# Altium PCB ComboCamera_MT9.PcbDoc (part 2 of 2)
Units mm, origin at the board's own origin, x right, y up, seen from the top; angles counter-clockwise.
Board outline 54.59 x 25.9 mm, 6 copper layers (L1, L2, Layer 1, Layer 2, L5, L6), stack 1.597 mm thick; 83 components, 53 nets, 269 pads, 162 vias.
Unrouted connection lines stored in the file: 226.
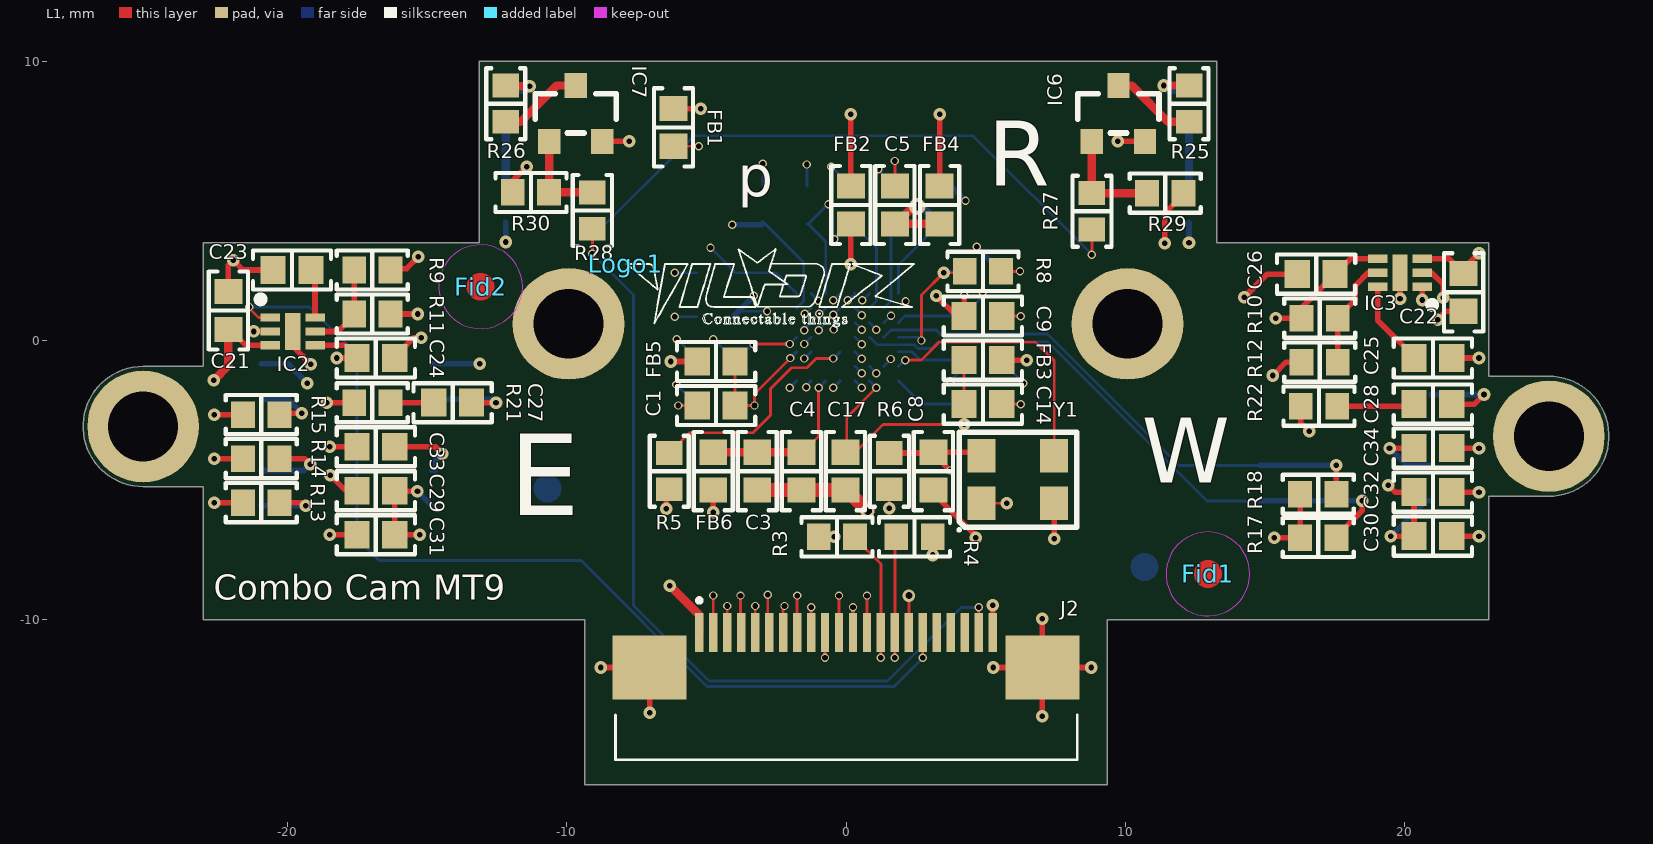
[diagram p0: L1 view]

## Via types
v1: diameter 0.3, hole 0.2, L1 to L6, tented both sides, 82 vias
v2: diameter 0.45, hole 0.2, L1 to L6, tented both sides, 77 vias
v3: diameter 0.45, hole 0.25, L1 to L6, tented both sides, 1 vias
v4: diameter 0.5, hole 0.3, L1 to L6, tented both sides, 1 vias
v5: diameter 0.6, hole 0.3, L1 to L6, tented both sides, 1 vias

## Nets (pads, with @x,y where several pads share a name; then routed paths per layer and width w, separated by ;. In a path a pad name is that pad's centre, name@x,y a point inside that pad or via, vN(x,y) a via of type N, cw(c..) or ccw(c..) an arc to the next point about the centre after c; other vN are vias at no path point) (continued)
D3: (continued)
  Layer 1 w0.1: -3.25,-9.2 v1(-3.25,-9.5) -3.25,-8.325 -2.986,-8.061 -2.986,-7.911 -2.986,-7.611 -2.982,-7.611 ccw(c-2.982,-7.461) -2.832,-7.461 ccw(c-2.982,-7.461) -2.982,-7.311 -2.986,-7.311 -3.1,-7.311 cw(c-3.1,-7.161) -3.25,-7.161 cw(c-3.1,-7.161) -3.1,-7.011 -2.986,-7.011 -2.982,-7.011 ccw(c-2.982,-6.861) -2.832,-6.861 ccw(c-2.982,-6.861) -2.982,-6.711 -2.986,-6.711 -3.1,-6.711 cw(c-3.1,-6.561) -3.25,-6.561 cw(c-3.1,-6.561) -3.1,-6.411 -2.986,-6.411 -2.906,-6.411 ccw(c-2.906,-6.261) -2.756,-6.261 ccw(c-2.906,-6.261) -2.906,-6.111 -2.986,-6.111 -3.1,-6.111 cw(c-3.1,-5.961) -3.25,-5.961 cw(c-3.1,-5.961) -3.1,-5.811 -2.986,-5.811 -2.905,-5.811 ccw(c-2.905,-5.661) -2.755,-5.661 ccw(c-2.905,-5.661) -2.905,-5.511 -2.986,-5.511 -3.1,-5.511 cw(c-3.1,-5.361) -3.25,-5.361 cw(c-3.1,-5.361) -3.1,-5.211 -2.986,-5.211 -2.905,-5.211 ccw(c-2.905,-5.061) -2.755,-5.061 ccw(c-2.905,-5.061) -2.905,-4.911 -2.986,-4.911 -3.1,-4.911 cw(c-3.1,-4.761) -3.25,-4.761 cw(c-3.1,-4.761) -3.1,-4.611 -2.986,-4.611 -2.905,-4.611 ccw(c-2.905,-4.461) -2.755,-4.461 ccw(c-2.905,-4.461) -2.905,-4.311 -2.986,-4.311 -3.1,-4.311 cw(c-3.1,-4.161) -3.25,-4.161 cw(c-3.1,-4.161) -3.1,-4.011 -2.986,-4.011 -2.905,-4.011 ccw(c-2.905,-3.861) -2.755,-3.861 ccw(c-2.905,-3.861) -2.905,-3.711 cw(c-2.905,-3.63) -2.986,-3.63 -2.986,-3.411 -2.986,-1.652 -2.455,-1.12 -2.455,0.186 -1.977,0.664 -1.354,0.664 -0.711,0.664 v1(-0.459,0.916)
  L6 w0.1: v1@-3.278,-9.472 v1(-3.25,-9.5) ; v1@-0.453,0.911 IC1.B5
D4: IC1.A4 J2.6 | length 18.1
  L1 w0.1: v1(-2.8,-9.1) -2.8,-10.4 J2.6
  Layer 1 w0.1: v1(-2.8,-9.1) -2.8,-8.632 -2.644,-8.475 -2.644,-6.826 -2.644,-6.676 -2.644,-6.524 cw(c-2.496,-6.524) -2.496,-6.376 ccw(c-2.496,-6.226) -2.346,-6.226 ccw(c-2.496,-6.226) -2.496,-6.076 cw(c-2.496,-5.928) -2.644,-5.928 -2.644,-5.926 cw(c-2.494,-5.926) -2.494,-5.776 -2.364,-5.776 ccw(c-2.364,-5.626) -2.214,-5.626 ccw(c-2.364,-5.626) -2.364,-5.476 -2.494,-5.476 cw(c-2.494,-5.326) -2.644,-5.326 cw(c-2.494,-5.326) -2.494,-5.176 -2.364,-5.176 ccw(c-2.364,-5.026) -2.214,-5.026 ccw(c-2.364,-5.026) -2.364,-4.876 -2.494,-4.876 cw(c-2.494,-4.726) -2.644,-4.726 cw(c-2.494,-4.726) -2.494,-4.576 -2.364,-4.576 ccw(c-2.364,-4.426) -2.214,-4.426 ccw(c-2.364,-4.426) -2.364,-4.276 -2.494,-4.276 cw(c-2.494,-4.126) -2.644,-4.126 cw(c-2.494,-4.126) -2.494,-3.976 -2.364,-3.976 ccw(c-2.364,-3.826) -2.214,-3.826 ccw(c-2.364,-3.826) -2.364,-3.676 -2.494,-3.676 cw(c-2.494,-3.526) -2.644,-3.526 cw(c-2.494,-3.526) -2.494,-3.376 -2.364,-3.376 ccw(c-2.364,-3.226) -2.214,-3.226 ccw(c-2.364,-3.226) -2.364,-3.076 -2.494,-3.076 cw(c-2.494,-2.926) -2.644,-2.926 cw(c-2.494,-2.926) -2.494,-2.776 -2.255,-2.776 ccw(c-2.255,-2.626) -2.105,-2.626 ccw(c-2.255,-2.626) -2.255,-2.476 -2.494,-2.476 cw(c-2.494,-2.326) -2.644,-2.326 -2.644,-2.176 -2.644,-2.1 -2.644,-1.9 -1.676,-0.933 -1.379,-0.933 -1.149,-0.703 -1.149,-0.282 -0.778,0.089 -0.339,0.089 -0.149,0.279 -0.149,1.222 0.061,1.431 v1(0.061,1.436)
  L6 w0.1: v1@0.067,1.431 IC1.A4 IC1.A4@0.305,1.68
D5: IC1.B4 J2.7 | length 17.9
  L1 w0.1: J2.7 -2.25,-9.55 v1(-2.2,-9.5)
  Layer 1 w0.1: v1(-2.2,-9.5) -2.2,-8.95 -1.55,-8.3 -1.55,-7.975 -1.55,-7.2 -1.55,-7.186 ccw(c-1.686,-7.186) -1.686,-7.05 cw(c-1.686,-6.9) -1.836,-6.9 cw(c-1.686,-6.9) -1.686,-6.75 -1.55,-6.75 -1.414,-6.75 ccw(c-1.414,-6.6) -1.264,-6.6 ccw(c-1.414,-6.6) -1.414,-6.45 -1.55,-6.45 -1.686,-6.45 cw(c-1.686,-6.3) -1.836,-6.3 cw(c-1.686,-6.3) -1.686,-6.15 -1.55,-6.15 -1.414,-6.15 ccw(c-1.414,-6) -1.264,-6 ccw(c-1.414,-6) -1.414,-5.85 -1.55,-5.85 -1.686,-5.85 cw(c-1.686,-5.7) -1.836,-5.7 cw(c-1.686,-5.7) -1.686,-5.55 -1.55,-5.55 -1.371,-5.55 ccw(c-1.371,-5.4) -1.221,-5.4 ccw(c-1.371,-5.4) -1.371,-5.25 -1.55,-5.25 -1.686,-5.25 cw(c-1.686,-5.1) -1.836,-5.1 cw(c-1.686,-5.1) -1.686,-4.95 -1.55,-4.95 -1.371,-4.95 ccw(c-1.371,-4.8) -1.221,-4.8 ccw(c-1.371,-4.8) -1.371,-4.65 -1.55,-4.65 -1.686,-4.65 cw(c-1.686,-4.5) -1.836,-4.5 cw(c-1.686,-4.5) -1.686,-4.35 -1.55,-4.35 -1.371,-4.35 ccw(c-1.371,-4.2) -1.221,-4.2 ccw(c-1.371,-4.2) -1.371,-4.05 -1.55,-4.05 -1.686,-4.05 cw(c-1.686,-3.9) -1.836,-3.9 cw(c-1.686,-3.9) -1.686,-3.75 ccw(c-1.686,-3.614) -1.55,-3.614 -1.55,-3.45 -1.55,-3.3 -0.988,-2.738 -0.15,-1.9 -0.15,-0.4 0.239,-0.011 0.239,0.583 v1(0.56,0.904)
  L6 w0.1: IC1.B4@0.316,1.159 v1@0.565,0.91
D6: IC1.A3 J2.8 | length 17.8
  L1 w0.1: J2.8 v1(-1.75,-9.126)
  Layer 1 w0.1: v1(-1.75,-9.126) -1.75,-9.85 -1.925,-10.025 -2.325,-10.025 -2.489,-9.861 -2.489,-8.64 -2.025,-8.176 -2.025,-8.026 -2.025,-7.862 cw(c-1.889,-7.862) -1.889,-7.726 ccw(c-1.889,-7.576) -1.739,-7.576 ccw(c-1.889,-7.576) -1.889,-7.426 -2.025,-7.426 -2.305,-7.426 cw(c-2.305,-7.276) -2.455,-7.276 cw(c-2.305,-7.276) -2.305,-7.126 -2.175,-7.126 ccw(c-2.175,-6.976) -2.025,-6.976 ccw(c-2.175,-6.976) -2.175,-6.826 -2.305,-6.826 cw(c-2.305,-6.676) -2.455,-6.676 cw(c-2.305,-6.676) -2.305,-6.526 -2.151,-6.526 ccw(c-2.151,-6.4) -2.025,-6.4 -2.025,-5.775 -2.025,-2.875 -1.73,-2.58 -1.73,-1.551 -0.961,-0.781 -0.961,-0.361 -0.7,-0.1 -0.26,-0.1 0.05,0.21 0.05,0.905 v1(0.581,1.436)
  L6 w0.1: v1@0.587,1.431 IC1.A3
D7: IC1.D4 J2.9 | length 17.7
  L1 w0.1: J2.9 v1(-1.25,-9.55)
  Layer 1 w0.1: v1(-1.25,-9.55) -1.075,-9.375 -1.075,-5.925 -1.075,-5.8 cw(c-0.925,-5.8) -0.925,-5.65 -0.7,-5.65 ccw(c-0.7,-5.5) -0.55,-5.5 ccw(c-0.7,-5.5) -0.7,-5.35 -0.925,-5.35 cw(c-0.925,-5.2) -1.075,-5.2 cw(c-0.925,-5.2) -0.925,-5.05 -0.7,-5.05 ccw(c-0.7,-4.9) -0.55,-4.9 ccw(c-0.7,-4.9) -0.7,-4.75 -0.925,-4.75 cw(c-0.925,-4.6) -1.075,-4.6 cw(c-0.925,-4.6) -0.925,-4.45 -0.7,-4.45 ccw(c-0.7,-4.3) -0.55,-4.3 ccw(c-0.7,-4.3) -0.7,-4.15 -0.925,-4.15 cw(c-0.925,-4) -1.075,-4 cw(c-0.925,-4) -0.925,-3.85 -0.7,-3.85 ccw(c-0.7,-3.7) -0.55,-3.7 ccw(c-0.7,-3.7) -0.7,-3.55 -0.925,-3.55 cw(c-0.925,-3.4) -1.075,-3.4 -1.075,-3.275 -0.969,-3.169 -0.863,-3.063 cw(c-0.757,-3.169) -0.651,-3.063 -0.27,-3.443 ccw(c-0.164,-3.337) -0.058,-3.443 ccw(c-0.164,-3.337) -0.058,-3.231 -0.545,-2.745 cw(c-0.453,-2.653) -0.545,-2.562 -0.515,-2.533 cw(c-0.424,-2.624) -0.333,-2.533 0.147,-3.013 ccw(c0.254,-2.906) 0.36,-3.013 ccw(c0.254,-2.906) 0.36,-2.8 -0.014,-2.426 cw(c0.092,-2.32) -0.014,-2.214 0.025,-2.175 0.039,-2.161 0.039,-0.658 v1(0.562,-0.135)
  L6 w0.1: IC1.D4 0.318,0.12 v1@0.567,-0.129
DCMI_HSYNC: IC1.C7 J2.12 | length 17.7
  L1 w0.1: J2.12 v1(0.25,-9.55)
  Layer 2 w0.1: v1(-1.5,0.375) -1.929,0.375 -2.775,-0.471 -2.775,-3 -2.775,-3.125 ccw(c-2.625,-3.125) -2.625,-3.275 -2.45,-3.275 cw(c-2.45,-3.425) -2.3,-3.425 cw(c-2.45,-3.425) -2.45,-3.575 -2.625,-3.575 ccw(c-2.625,-3.725) -2.775,-3.725 ccw(c-2.625,-3.725) -2.625,-3.875 -2.45,-3.875 cw(c-2.45,-4.025) -2.3,-4.025 cw(c-2.45,-4.025) -2.45,-4.175 -2.625,-4.175 ccw(c-2.625,-4.325) -2.775,-4.325 ccw(c-2.625,-4.325) -2.625,-4.475 -2.45,-4.475 cw(c-2.45,-4.625) -2.3,-4.625 cw(c-2.45,-4.625) -2.45,-4.775 -2.625,-4.775 ccw(c-2.625,-4.925) -2.775,-4.925 ccw(c-2.625,-4.925) -2.625,-5.075 -2.45,-5.075 cw(c-2.45,-5.225) -2.3,-5.225 cw(c-2.45,-5.225) -2.45,-5.375 -2.625,-5.375 ccw(c-2.625,-5.525) -2.775,-5.525 ccw(c-2.625,-5.525) -2.625,-5.675 -2.45,-5.675 cw(c-2.45,-5.825) -2.3,-5.825 cw(c-2.45,-5.825) -2.45,-5.975 -2.625,-5.975 ccw(c-2.625,-6.125) -2.775,-6.125 ccw(c-2.625,-6.125) -2.625,-6.275 -2.45,-6.275 cw(c-2.45,-6.425) -2.3,-6.425 cw(c-2.45,-6.425) -2.45,-6.575 -2.625,-6.575 ccw(c-2.625,-6.725) -2.775,-6.725 -2.775,-6.875 -2.775,-7.025 -0.25,-9.55 v1(0.25,-9.55)
  L6 w0.1: v1@-1.493,0.391 IC1.C7
DCMI_NRST: IC1.E5 J2.16 R5.2 | length 19.1
  L1 w0.1: R5.2 -5.6,-3.3 -3.325,-3.3 -2.7,-2.675 -2.7,-1.725 -1.95,-0.975 -1.397,-0.975 -1.066,-0.644 v1(-0.459,-0.644) ; J2.16 v3(2.25,-9.125)
  Layer 2 w0.1: v1(-0.459,-0.644) 0.05,-1.153 0.05,-2.075 2.25,-4.275 v3(2.25,-9.125)
  L6 w0.1: v1@-0.453,-0.649 IC1.E5
DCMI_PIXCK: IC1.F2 J2.11 | length 17.8
  L1 w0.1: J2.11 v1(-0.25,-9.126)
  Layer 1 w0.1: v1(-0.25,-9.126) 0.125,-8.751 0.125,-8.601 0.125,-8.451 cw(c0.275,-8.451) 0.275,-8.301 0.7,-8.301 ccw(c0.7,-8.151) 0.85,-8.151 ccw(c0.7,-8.151) 0.7,-8.001 0.125,-8.001 -0.05,-8.001 cw(c-0.05,-7.851) -0.2,-7.851 cw(c-0.05,-7.851) -0.05,-7.701 0.125,-7.701 0.7,-7.701 ccw(c0.7,-7.551) 0.85,-7.551 ccw(c0.7,-7.551) 0.7,-7.401 0.125,-7.401 0.037,-7.401 cw(c0.037,-7.251) -0.113,-7.251 cw(c0.037,-7.251) 0.037,-7.101 0.125,-7.101 0.7,-7.101 ccw(c0.7,-6.951) 0.85,-6.951 ccw(c0.7,-6.951) 0.7,-6.801 0.125,-6.801 -0.05,-6.801 cw(c-0.05,-6.651) -0.2,-6.651 cw(c-0.05,-6.651) -0.05,-6.501 0.125,-6.501 0.298,-6.501 ccw(c0.298,-6.351) 0.448,-6.351 ccw(c0.298,-6.351) 0.298,-6.201 0.125,-6.201 -0.05,-6.201 cw(c-0.05,-6.051) -0.2,-6.051 cw(c-0.05,-6.051) -0.05,-5.901 0.125,-5.901 0.365,-5.901 ccw(c0.365,-5.751) 0.515,-5.751 ccw(c0.365,-5.751) 0.365,-5.601 0.275,-5.601 cw(c0.275,-5.451) 0.125,-5.451 0.125,-5.35 0.125,-3.514 1.369,-2.27 1.369,-0.899 v1(1.608,-0.66)
  L6 w0.1: IC1.F2 1.356,-0.912 v1(1.608,-0.66)
DCMI_PWREN: IC2.1 J2.17 | length 35.8
  L1 w0.1: v1(-21.35,1.2) -21.35,1.15 -21.025,0.825 IC2.1 ; v1(2.75,-11.35) J2.17
  L6 w0.1: v1(-21.35,1.2) -19.2,1.2 -17.5,-0.5 -17.5,-7.075 -16.7,-7.875 -9.475,-7.875 -4.975,-12.375 1.725,-12.375 v1(2.75,-11.35)
DCMI_SCL: IC1.D2 IC4.3 IC5.3 J2.14 R3.1 R14.1 R18.1 | length 70.2
  L1 w0.1: R3.1 0.325,-7.075 1.25,-8 J2.14 v1(1.25,-11.35)
  L1 w0.2: R14.1 -19.375,-4.225 v2(-19.175,-4.425) ; R18.1 v2(17.55,-4.47)
  Layer 2 w0.1: v2(-19.175,-4.425) -19.175,-4.9 -15.5,-8.575 -9.508,-8.575 -6.283,-11.8 0.8,-11.8 v1(1.25,-11.35) 7.6,-5 17.02,-5 v2(17.55,-4.47)
  L6 w0.1: IC1.D2 1.608,0.372 3.228,0.372 3.364,0.236 7.206,0.236 11.912,-4.47 IC5.3
  L6 w0.2: IC4.3 -20.915,-4.65 -19.4,-4.65 v2(-19.175,-4.425) ; IC5.3 v2(17.55,-4.47)
DCMI_SDA: IC1.D3 IC4.2 IC5.2 J2.15 R4.1 R13.1 R17.1 | length 72.3
  L1 w0.1: v1(1.75,-11.35) J2.15 1.75,-7.075 R4.1
  L1 w0.2: R13.1 -19.503,-5.8 -19.393,-5.91 v2(-19.325,-5.91) ; R17.1 17.55,-7 18.475,-6.075 v2(18.475,-5.74)
  Layer 2 w0.1: v2(-19.325,-5.91) -18.432,-5.91 -15.578,-8.764 -9.586,-8.764 -6.361,-11.989 1.111,-11.989 v1(1.75,-11.35) 7.9,-5.2 17.935,-5.2 v2(18.475,-5.74)
  L6 w0.1: IC1.D3 1.104,-0.148 2.44,-0.148 2.58,-0.289 3.058,-0.289 3.297,-0.05 7.225,-0.05 12.915,-5.74 IC5.2
  L6 w0.2: IC4.2 v2(-19.325,-5.91) ; IC5.2 v2(18.475,-5.74)
DCMI_VSYNC: IC1.C6 J2.13 | length 17.8
  L1 w0.1: J2.13 v1(0.75,-9.126)
  Layer 2 w0.1: v1(-0.975,0.375) -1.264,0.664 -1.38,0.664 -1.907,0.664 -2.964,-0.393 -2.964,-2.7 -2.964,-2.975 -2.964,-3.125 cw(c-3.114,-3.125) -3.114,-3.275 -3.325,-3.275 ccw(c-3.325,-3.425) -3.475,-3.425 ccw(c-3.325,-3.425) -3.325,-3.575 -3.114,-3.575 cw(c-3.114,-3.725) -2.964,-3.725 cw(c-3.114,-3.725) -3.114,-3.875 -3.325,-3.875 ccw(c-3.325,-4.025) -3.475,-4.025 ccw(c-3.325,-4.025) -3.325,-4.175 -3.114,-4.175 cw(c-3.114,-4.325) -2.964,-4.325 -2.964,-4.475 -2.964,-4.775 -2.964,-4.925 -2.964,-7.103 -0.228,-9.839 0.37,-9.839 0.75,-9.459 v1(0.75,-9.126)
  L6 w0.1: v1(-0.975,0.375) IC1.C6
EXCLK: IC1.F1 Y1.3 | length 9.6
  L1 w0.1: v1(2.125,-0.7) 2.695,-0.7 3.334,-0.061 6.786,-0.061 7.45,-0.725 Y1.3 Y1.3@7.475,-4.15
  L6 w0.1: IC1.F1 v1@2.111,-0.686
GND: C8.1 C21.1 C22.1 C23.1 C24.1 C25.1 C26.1 C29.2 C30.2 C31.1 C32.1 C33.2 C34.2 FB1.2 HOLDER1.GND IC2.2 IC2.7 IC3.2 IC3.7 IC4.6 IC5.5 IC5.6 IC6.2 IC7.2 J2.10 J2.22 J2.MP1 J2.MP2 pad. R11.2 R12.2 R21.1 R22.1 R29.2 R30.2 Y1.2 | length 46.9
  L1 w0.1: v1(-0.75,-11.35) J2.10
  L1 w0.2: C21.1 -22.1,2.7 v2(-21.925,2.875) -21.575,2.525 C23.1 ; v2(-21.2,0.325) IC2.2 ; IC2.7 -19.8,-0.2 v2(-19.15,-0.85) ; v2(-18.575,-2.225) R21.1 ; v2(-18.475,-6.95) C31.1 ; v2(-18.475,-3.8) C33.2 ; v2(-18.45,-4.825) -17.95,-5.325 -17.5,-5.325 C29.2 ; R11.2 v2(-15.325,0.95) ; C24.1 -16.15,-0.575 -15.475,0.1 v2(-15.2,0.1) ; R30.2 -11.925,5.725 v2(-11.425,6.225) ; v2(-8.775,-11.7) J2.MP1 v2(-7.025,-13.325) ; IC7.2 v2(-7.75,7.125) ; FB1.2 v2(-5.2,8.3) ; C8.1 3.125,-5.467 4.65,-6.992 v2(4.65,-7.061) ; J2.22 v2(5.25,-9.475) ; v2(5.275,-11.7) J2.MP2 ; v2(7.025,-13.45) J2.MP2 ; v2(7.025,-9.95) J2.MP2 ; v2(7.45,-7.1) Y1.2 ; v2(8.775,-11.7) J2.MP2 ; v2(9.725,7.125) IC6.2 ; v2(11.4,3.475) 11.4,4.55 12.075,5.225 R29.2 ; v2(14.25,1.55) 15.075,2.375 C26.1 ; v2(15.275,-1.25) 15.75,-0.775 R12.2 ; R22.1 16.275,-2.95 v2(16.575,-3.25) ; v2(19.825,1.5) IC3.7 ; IC3.2 20.95,2.425 21.375,2 v2(21.375,1.525) ; v2(21.175,0.75) 21.475,1.05 C22.1 ; C30.2 v2(22.65,-7) ; C32.1 v2(22.65,-5.425) ; C34.2 v2(22.65,-3.85) ; C25.1 v2(22.65,-0.625)
  L6 w0.2: IC4.6 -19.975,-0.83 -19.28,-1.525 v2(-19.275,-1.525)
NetC23_2: C23.2 IC2.6 | length 1.8
  L1 w0.2: C23.2 -19,2.375 IC2.6
NetC25_2: C25.2 IC3.6 | length 3.1
  L1 w0.2: IC3.6 19.025,0.725 20.325,-0.575 C25.2
NetC27_1: C27.1 R21.2 | length 1.5
  L1 w0.2: R21.2 C27.1
NetC27_2: C27.2 IC4.10 | length 3.2
  L1 w0.2: C27.2 v2(-12.525,-2.225)
  L6 w0.2: IC4.10 -12.65,-2.1 v2(-12.525,-2.225)
NetC28_1: C28.1 R22.2 | length 2.8
  L1 w0.2: R22.2 20.25,-2.35 C28.1
NetC28_2: C28.2 IC5.10 | length 3.2
  L1 w0.2: C28.2 22.485,-2.275 v2(22.83,-1.93)
  L6 w0.2: IC5.10 v2(22.83,-1.93)
NetC33_1: C33.1 IC4.12 | length 2.6
  L1 w0.2: C33.1 -14.7,-3.8 v2(-14.45,-4.05)
  L6 w0.2: IC4.12 -14.7,-4.64 -14.7,-4.3 v2(-14.45,-4.05)
NetC34_1: C34.1 IC5.12 | length 2.6
  L1 w0.2: v2(19.45,-3.85) C34.1
  L6 w0.2: v2(19.45,-3.85) 20.07,-4.47 IC5.12
NetD1_2: D1.2 D3.1 | length 1.7
  L6 w0.3: D1.2 D3.1
NetD2_2: D2.2 D4.1 | length 1.7
  L6 w0.3: D2.2 D4.1
NetD3_2: D3.2 R25.2 | length 1.9
  L1 w0.3: v2(11.375,9.125) R25.2
  L6 w0.3: v2(11.375,9.125) 11.525,8.975 D3.2
NetD4_2: D4.2 R26.2 | length 1.8
  L1 w0.3: R26.2 -12.15,9.1 v2(-11.325,9.1)
  L6 w0.3: D4.2 -11.45,8.975 v2(-11.325,9.1)
NetIC2_5: IC2.5 R9.1 R11.1 | length 3.3
  L1 w0.2: IC2.5 -18.175,0.325 -17.6,0.9 R11.1 R9.1
NetIC3_5: IC3.5 R10.1 R12.1 | length 4
  L1 w0.2: R12.1 R10.1 17.6,0.85 18.225,1.475 18.225,1.975 18.675,2.425 IC3.5
NetIC4_1: IC4.1 IC4.7 IC4.8 IC4.11 IC4.14
NetIC4_5: IC4.5 R15.1 | length 2.5
  L1 w0.2: R15.1 -20.225,-2.6 v2(-19.475,-2.6)
  L6 w0.2: IC4.5 -19.975,-2.1 v2(-19.475,-2.6)
NetIC5_1: IC5.1 IC5.7 IC5.8 IC5.11 IC5.14
NetIC6_1: IC6.1 R27.2 R29.1 | length 3.8
  L1 w0.3: IC6.1 R27.2 R29.1
NetIC6_3: IC6.3 R25.1 | length 3.1
  L1 w0.3: IC6.3 10.225,9.125 11.525,7.825 R25.1
NetIC7_1: IC7.1 R28.2 R30.1 | length 3.4
  L1 w0.3: IC7.1 R30.1 R28.2
NetIC7_3: IC7.3 R26.1 | length 3
  L1 w0.3: R26.1 -11.65,7.825 -10.35,9.125 IC7.3
NetR6_2: R6.2 Y1.1 | length 6.3
  L1 w0.1: v2(1.55,-6) R6.2 R6.2@1.6,-5.325 ; Y1.1@4.575,-6.1 Y1.1 v2(5.75,-5.825)
  Layer 1 w0.1: v2(1.55,-6) 5.48,-6 5.655,-5.825 v2(5.75,-5.825)
SPI_MISO: J2.19
SPI_MOSI: J2.20
SPI_SCL: J2.18
VDD: C14.2 C15.2 C16.2 C17.2 C18.2 C19.2 C20.2 FB3.1 IC1.A6 IC1.A8 IC1.C1 IC1.D8 IC1.G1 IC1.G3 | length 52.1
  L1 w0.1: v1(-3.31,-0.127) -3.309,-0.125 -2.02,-0.125 v1(-2.019,-0.124) ; C17.2 C17.2@0.025,-3.95 ; v1(1.08,-1.695) 0.025,-2.75 C17.2@0.025,-3.95 ; FB3.1 C14.2 v2(4.225,-3) 1.325,-3 0.375,-3.95 C17.2@0.025,-3.95
  L2 w0.1: v1(-4.75,0.05) -4.75,0.104 -4.85,0.204 v1(-4.85,3.325) -4.85,4.508 -3.991,5.366 -0.134,5.366 ; v1(-0.625,4.875) -0.134,5.366 ; v2(4.225,-3) 4.9,-2.325 v1(4.9,1.725) 4.9,3.166 4.964,3.23 4.964,4.905 4.502,5.366 -0.134,5.366
  L6 w0.1: v1(-4.85,3.325) -4,2.475 C19.2 -2.509,2.425 IC1.A8 ; v1(-4.75,0.05) C18.2 -3.875,-0.675 -3.327,-0.127 v1(-3.31,-0.127) ; v1@-2.013,-0.129 IC1.D8 IC1.D8@-1.764,0.102 ; C20.2 C20.2@-1.35,4.175 ; IC1.A6 -0.724,3.549 C20.2@-1.35,4.175 ; v1(-0.625,4.875) -0.65,4.875 C20.2@-1.35,4.175 ; IC1.G3@0.831,-1.446 IC1.G3 v1@1.085,-1.689 ; IC1.G1 2.711,-2.275 C16.2 v2(4.225,-3) ; IC1.C1 2.111,0.875 C15.2 4.225,0.925 4.9,1.6 v1(4.9,1.725)
VIO: C8.2 C9.2 C10.2 C11.2 C12.2 C13.2 FB2.1 IC1.B3 IC1.B8 IC1.C5 IC1.E1 R3.2 R4.2 R5.1 R6.1 R7.1 Y1.4 | length 34.9
  L1 w0.2: v2(-6.425,-6.025) -6.425,-5.425 R5.1 ; R3.2 v2(-0.425,-7.025) ; v2(0.175,2.725) FB2.1 ; R6.1 C8.2@3.1,-4.025 ; v2(3.1,-7.675) R4.2 ; v2(3.225,1.6) 3.95,0.875 C9.2 v1(4.225,1.625) ; v1(3.725,-4.65) C8.2@3.1,-4.025 ; Y1.4 4.725,-4 C8.2 C8.2@3.1,-4.025
  L2 w0.1: v1(-2.825,1.05) -2.825,-0.6 -2.425,-1 -1.325,-1 -0.44,-0.115 v1(-0.44,0.396)
  L2 w0.2: v2(0.175,2.725) 2.1,2.725 v2(3.225,1.6)
  L6 w0.1: C13.2 -3.8,1.05 v1(-2.825,1.05) ; C12.2 -2.925,4.2 -1.512,2.787 -1.512,1.412 IC1.B8 ; v1@-0.434,0.391 -0.185,0.64 IC1.C5 IC1.C5@-0.204,0.618 ; C11.2@0.125,4.175 C11.2 0.225,4.175 1.088,3.312 1.088,1.412 IC1.B3 ; IC1.E1 2.364,-0.4 2.664,-0.7 C10.2 4.225,-0.95 v1(3.725,-1.45)
  L6 w0.2: v1(-4.075,4.15) -3.025,4.15 C12.2 ; C13.2 -4,0.9 v1(-3.3,1.6) ; v1(-0.425,3.625) C11.2@0.125,4.175 ; v1(4.675,3.35) R7.1
VPHY: C1.2 C2.2 FB5.1 IC1.E8 | length 5.6
  L1 w0.1: FB5.1 C1.2 v1(-3.275,-2.325) -3.275,-1.911 v1(-1.991,-0.627)
  L6 w0.1: C2.2@-3.975,-2.275 C2.2 v1(-3.275,-2.325) ; v1(-1.991,-0.627) IC1.E8
VPLL: C3.2 C4.2 FB6.1 IC1.G6 | length 6.1
  L1 w0.1: C4.2 -1.55,-4 -0.979,-3.429 v1(-0.979,-1.684)
  L1 w0.3: FB6.1 C3.2 C4.2
  L6 w0.1: v1@-0.973,-1.689 IC1.G6
pads on no net: IC1.A2 IC1.D5 IC1.D6 IC1.E2 IC1.E3 IC1.E6 IC1.F5 IC1.F6 IC1.F7 IC1.F8 IC1.G2 IC4.4 IC5.4

## Polygon pours and split planes (outlines as drawn)
3v on L2 "L3-3V" (solid, pour order 55): -23,-10 -23,-5.225 -25.15,-5.225 cw(c-25.15,-3.075) -25.15,-0.925 -23,-0.925 -23,3.5 -13.125,3.5 -13.125,10 13.275,10 13.275,3.5 23,3.5 23,-1.275 25.15,-1.275 cw(c25.15,-3.425) 25.15,-5.575 23,-5.575 23,-10 9.35,-10 9.35,-15.9 -9.35,-15.9 -9.35,-10
VIO on L2 "L2-VIO" (solid, pour order 51): 4.95,-4.9 4.95,-7.925 -1.9,-7.925 -1.9,-6.375 -6.95,-6.375 -6.95,-5.575 3.55,-5.575 3.55,3.15 -3.125,3.15 -3.125,0.075 -4.7,0.075 -4.7,5.125 4.95,5.125
GND on L5 "L5-GND" (solid, pour order 56): -23,-10 -23,-5.225 -25.15,-5.225 cw(c-25.15,-3.075) -25.15,-0.925 -23,-0.925 -23,3.5 -13.125,3.5 -13.125,10 13.275,10 13.275,3.5 23,3.5 23,-1.275 25.15,-1.275 cw(c25.15,-3.425) 25.15,-5.575 23,-5.575 23,-10 9.35,-10 9.35,-15.9 -9.35,-15.9 -9.35,-10
CAM_GND on L5 "L3-CAM_GND" (solid, pour order 48): -6.925,7.6 -6.925,-6.375 7.075,-6.375 7.075,7.6

## Keep-outs
L1:
  region: -6.925,7.575

## Silkscreen, mask and mechanical layers (free items; w line width, h text height)
Top Overlay:
  text "R" at 5.075,4.775 h4
  text "p" at -3.875,4.675 h2.5
  text "W" at 10.575,-5.85 h4
  text "E" at -12.05,-7.225 h5
  text "Combo Cam MT9" at -22.625,-9.575 h1.52
Bottom Overlay:
  text "Combo Cam MT9" at 5.825,-15.225 h1.8
Mechanical 1:
  lines w0.1: -23,-10 -23,-5.225 -25.15,-5.225 cw(c-25.15,-3.075) -25.15,-0.925 -23,-0.925 -23,3.5 -13.125,3.5 -13.125,10 13.275,10 13.275,3.5 23,3.5 23,-1.275 25.15,-1.275 cw(c25.15,-3.425) 25.15,-5.575 23,-5.575 23,-10 9.35,-10 9.35,-15.9 -9.35,-15.9 -9.35,-10 -22.975,-10

## Text inside footprints (layer, text, board x,y; h text height)
HOLDER1: Bottom Overlay "M12 HOLDER" at 2.429,-5.75 h0.9